# Altium PCB EtherIOv2.PcbDoc (part 2 of 2)
Units mil, origin at the board's own origin, x right, y up, seen from the top; angles counter-clockwise.
Board outline 4380 x 2505 mil, 2 copper layers (Top Layer, Bottom Layer); 104 components, 130 nets, 501 pads, 199 vias.
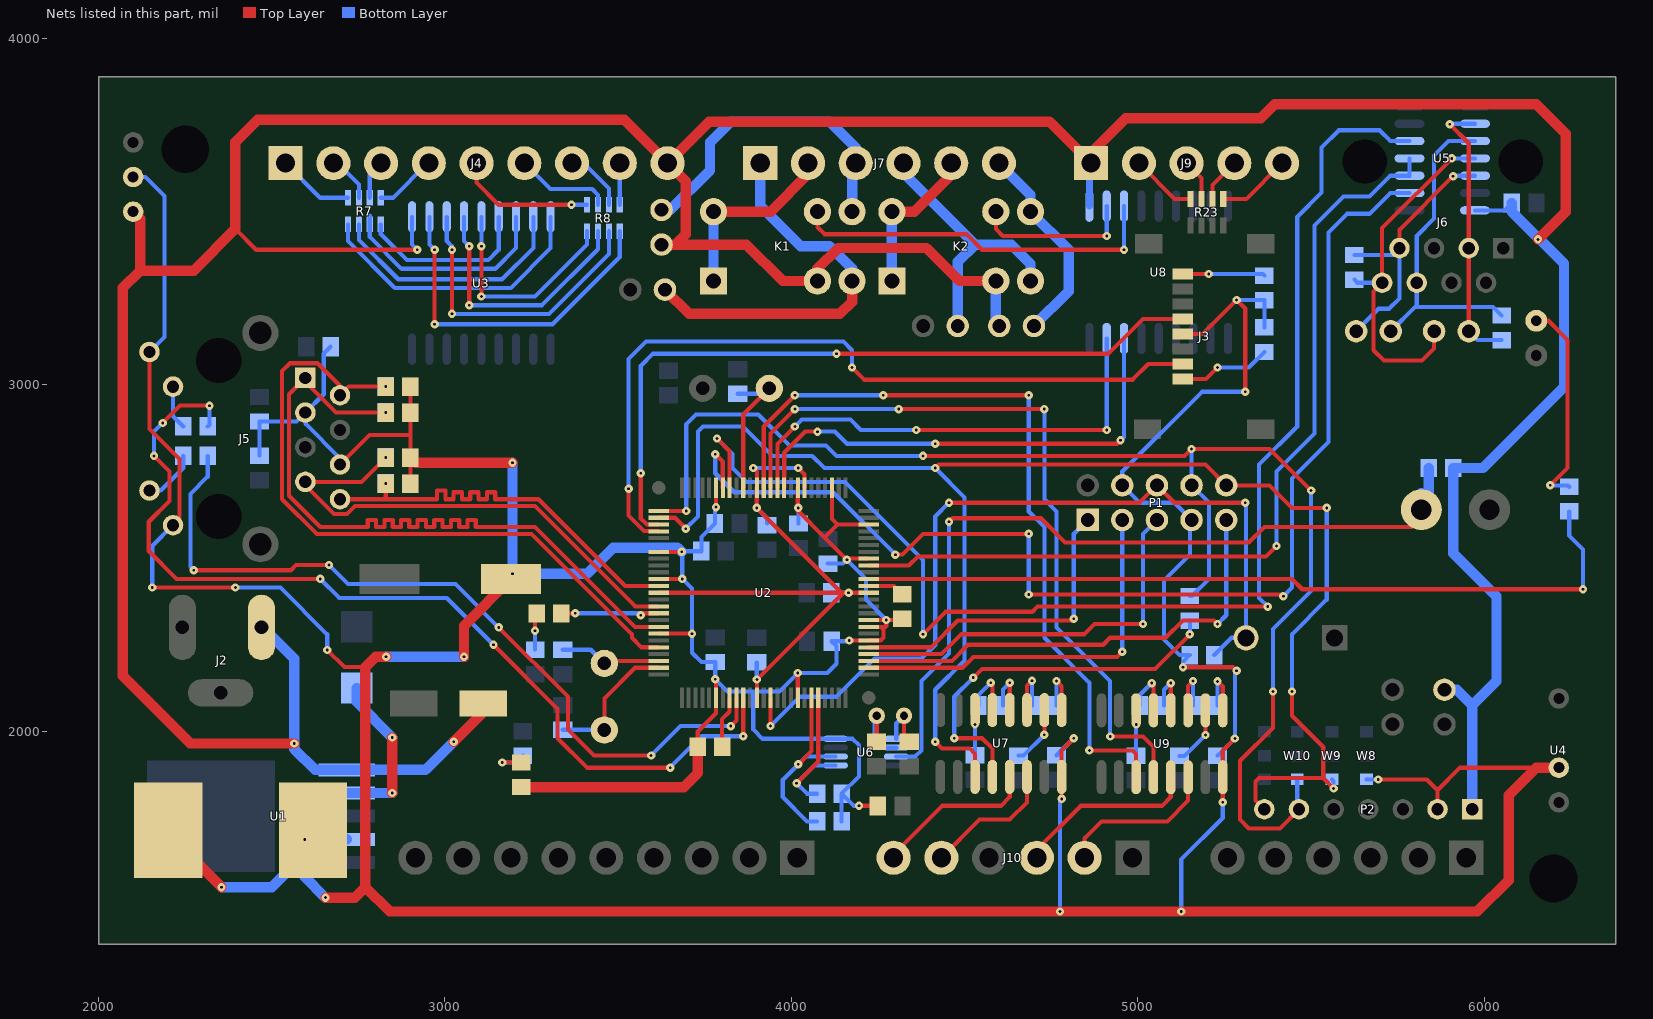
[diagram p2: the nets of this part, all layers, seen from the top]

## Via types
v1: diameter 24, hole 8, Top Layer to Bottom Layer, 199 vias

## Nets (pads, with @x,y where several pads share a name; then routed paths per layer and width w, separated by ;. In a path a pad name is that pad's centre, name@x,y a point inside that pad or via, vN(x,y) a via of type N, cw(c..) or ccw(c..) an arc to the next point about the centre after c; other vN are vias at no path point) (continued)
NetC6_2: C6.2 U2.16 X1.2 | length 415.4
  Top Layer w12: U2.16@3860.94,2703.15 3860.94,2914.88 X1.2@3936.06,2990
  Bottom Layer w12: C6.2@3845,2974.57 3920.63,2974.57 X1.2@3936.06,2990
NetC9_2: C9.2 U2.48 X2.1 | length 296.1
  Top Layer w12: X2.1@3460,2196.06 3467.09,2203.15 U2.48@3616.85,2203.15
  Bottom Layer w12: C9.2@3340,2235.43 3420.63,2235.43 X2.1@3460,2196.06
NetC10_2: C10.2 U2.49 X2.2 | length 404.8
  Top Layer w12: X2.2@3460,2003.94 3460,2095 3548.46,2183.46 U2.49@3616.85,2183.46
  Bottom Layer w12: C10.2@3340,2004.57 3459.37,2004.57 X2.2@3460,2003.94
NetC20_2: C20.2 C21.2 C22.2 U2.7 U2.14 U2.38 U2.62 U2.88 | length 1829.5
  Top Layer w12: U2.38@3616.85,2400 4145,2400 ; v1(3890,2760) 3900.32,2749.68 U2.14@3900.32,2703.15 3900,2702.83 v1(3900,2645) 4145,2400 ; U2.62@3900.32,2096.85 v1(3900.32,2149.68) 4150.63,2400 ; v1(4020,2760) 4038.11,2741.89 U2.7@4038.11,2703.15 ; U2.88@4223.15,2400 v1(4165,2400) 4150.63,2400 ; 4145,2400 4150.63,2400
  Bottom Layer w12: v1(3890,2760) v1(4020,2760) ; v1@3900,2150 C22.2@3900,2199.13 ; v1(3900,2645) 3930,2615 C21.2@3930,2600.43 ; C20.2@4115,2400 v1(4165,2400)
NetC24_2: C24.2 R21.2 U6.3 | length 2397.9
  Top Layer w12: v1(4455,2605) 4465,2615 4720,2615 4790,2545 5320,2545 5365,2590 5790,2590 5818.15,2618.15 C24.2@5818.15,2640
  Bottom Layer w12: U6.3@4302.6,1927.2 4357.2,1927.2 4375,1945 4375,2145 4455,2225 v1(4455,2605)
  Bottom Layer w30: C24.2@5818.15,2687.72 C24.2@5818.15,2640 5839.57,2661.42 R21.2@5839.57,2760
NetC25_2: C25.2 U6.1 X3.1 | length 156.7
  Top Layer w12: X3.1@4325,2045 4325,1985.43 C25.2@4340,1970.43
  Bottom Layer w12: U6.1@4302.6,1978.39 4302.6,2022.6 X3.1@4325,2045
NetC26_2: C26.2 U6.2 X3.2 | length 219.5
  Top Layer w12: C26.2@4245,1970.43 4246.26,1971.69 X3.2@4246.26,2045
  Bottom Layer w12: X3.2@4246.26,2045 4240,2038.74 4240,1975 4262.2,1952.8 U6.2@4302.6,1952.8
NetC29_1: C29.1 U7.3 | length 161.1
  Top Layer w12: U7.3@4680,2061.46 4680,2131.73 v1(4694.13,2145.87)
  Bottom Layer w12: C29.1@4694.13,2075 v1(4694.13,2145.87)
NetC29_2: C29.2 U7.1 | length 159.8
  Top Layer w12: v1(4765,2145) 4780,2130 U7.1@4780,2061.46
  Bottom Layer w12: C29.2@4765,2075 v1(4765,2145)
NetC30_1: C30.1 U7.2 | length 171.3
  Top Layer w12: v1(4730,1990) U7.2@4730,2061.46
  Bottom Layer w12: C30.1@4655,1930 4670,1930 v1(4730,1990)
NetC31_1: C31.1 U7.4 | length 151.5
  Top Layer w12: U7.4@4630,2061.46 v1(4630,2140)
  Bottom Layer w12: C31.1@4610.87,2075 4610.87,2120.87 v1(4630,2140)
NetC31_2: C31.2 U7.5 | length 160.1
  Top Layer w12: v1(4575,2140) 4580,2135 U7.5@4580,2061.46
  Bottom Layer w12: C31.2@4540,2075 4540,2105 v1(4575,2140)
NetC32_1: C32.1 U7.6 | length 130.6
  Top Layer w12: v1(4530,2020) U7.6@4530,2061.46
  Bottom Layer w12: C32.1@4530,1930.87 v1(4530,2020)
NetC34_1: C34.1 U9.3 | length 161.1
  Top Layer w12: U9.3@5145,2060.59 5145,2130.87 v1(5159.13,2145)
  Bottom Layer w12: C34.1@5159.13,2074.13 v1(5159.13,2145)
NetC34_2: C34.2 U9.1 | length 159.8
  Top Layer w12: v1(5230,2144.13) 5245,2129.13 U9.1@5245,2060.59
  Bottom Layer w12: C34.2@5230,2074.13 v1(5230,2144.13)
NetC35_1: C35.1 U9.2 | length 171.3
  Top Layer w12: v1(5195,1989.13) U9.2@5195,2060.59
  Bottom Layer w12: C35.1@5120,1929.13 5135,1929.13 v1(5195,1989.13)
NetC36_1: C36.1 U9.4 | length 151.5
  Top Layer w12: U9.4@5095,2060.59 v1(5095,2139.13)
  Bottom Layer w12: C36.1@5075.87,2074.13 5075.87,2120 v1(5095,2139.13)
NetC36_2: C36.2 U9.5 | length 160.1
  Top Layer w12: v1(5040,2139.13) 5045,2134.13 U9.5@5045,2060.59
  Bottom Layer w12: C36.2@5005,2074.13 5005,2104.13 v1(5040,2139.13)
NetC37_1: C37.1 U9.6 | length 130.6
  Top Layer w12: v1(4995,2020) U9.6@4995,2060.59
  Bottom Layer w12: C37.1@4995,1930 v1(4995,2020)
NetD1_2: D1.2 R1.2 | length 123.1
  Top Layer w12: v1(3165,1910) D1.2@3220,1910
  Bottom Layer w12: v1(3165,1910) 3205.43,1910 R1.2@3225,1929.57
NetD2_2: D2.2 L1.1 U1.2 | length 1279.7
  Top Layer w30: L1.1@2201.34,1715 2201.34,1703.66 v1(2355,1550) ; v1(2848.07,1821.93) v1(2848.07,1981.93)
  Bottom Layer w30: v1(2355,1550) 2500,1550 2545,1595 2545,1765 2601.93,1821.93 U1.2@2716.06,1821.93 v1(2848.07,1821.93) ; D2.2@2745,2125 2745,2085 v1(2848.07,1981.93)
NetD3_1: D3.1 R24.1 | length 610.2
  Top Layer w12: D3.1@6150,3185 6185,3185 6240,3130 6240,2760 v1(6190,2710)
  Bottom Layer w12: v1(6190,2710) 6240.87,2710 R24.1@6245,2705.87
NetJ3_1: J3.1 R2.1 | length 267.4
  Top Layer w12: J3.1@5130,3016.69 5196.69,3016.69 v1(5230,3050)
  Bottom Layer w12: v1(5230,3050) 5320,3050 R2.1@5365,3095
NetJ3_8: J3.8 R5.1 | length 236.8
  Top Layer w12: J3.8@5130,3319.84 v1(5204.84,3319.84)
  Bottom Layer w12: v1(5204.84,3319.84) 5360.59,3319.84 R5.1@5365,3315.43
NetJ4_1: J4.1 R7.1 | length 221.4
  Bottom Layer w12: J4.1@2540,3640 2640,3540 R7.1@2720,3540
NetJ4_2: J4.2 R7.2 | length 137.7
  Bottom Layer w12: J4.2@2677.8,3640 2690,3640 2751.5,3578.5 R7.2@2751.5,3540
NetJ4_3: J4.3 R7.3 | length 113.5
  Bottom Layer w12: R7.3@2782.99,3540 2782.99,3607.4 J4.3@2815.59,3640
NetJ4_4: J4.4 R7.4 | length 216.9
  Bottom Layer w12: R7.4@2814.49,3540 2850,3540 2950,3640 J4.4@2953.39,3640 J4.4@2990,3640
NetJ4_5: J4.5 R8.1 | length 401.4
  Top Layer w12: J4.5@3091.18,3640 3091.18,3583.82 3155,3520 v1(3365,3520)
  Bottom Layer w12: v1(3365,3520) R8.1@3410,3520
NetJ4_6: J4.6 R8.2 | length 297.3
  Bottom Layer w12: J4.6@3228.98,3640 3303.98,3565 3425,3565 3441.5,3548.5 R8.2@3441.5,3520 R8.2@3441.5,3538.38
NetJ4_7: J4.7 R8.3 | length 183.5
  Bottom Layer w12: J4.7@3366.77,3640 3400,3640 3472.99,3567.01 R8.3@3472.99,3520
NetJ4_8: J4.8 R8.4 | length 120
  Bottom Layer w12: R8.4@3504.49,3520 3504.49,3639.92 J4.8@3504.57,3640
NetJ5_P10: J5.P10 R10.2 | length 127.2
  Bottom Layer w12: J5.P10@2215,2995 2215,2909.57 R10.2@2244.57,2880
NetJ5_P11: J5.P11 R9.2 | length 159.7
  Bottom Layer w12: J5.P11@2147,2695 2179.57,2695 2244.57,2760 2244.57,2794.57 R9.2@2244.13,2795
NetJ7_1: J7.1 K1.NC W4.1 | length 1141.7
  Top Layer w30: W4.1@3635,3275 3705,3205 4140,3205 4175,3240 K1.NC@4175,3300
  Bottom Layer w30: J7.1@3910,3640 3910,3517.33 4027.33,3400 4110,3400 4175,3335 K1.NC@4175,3300
NetJ7_2: J7.2 K1.COM1 K1.COM2 | length 549.7
  Top Layer w30: K1.COM2@3775,3500 3940,3500 4047.8,3607.8 J7.2@4047.8,3640
  Bottom Layer w30: K1.COM1@3775,3300 K1.COM2@3775,3500
NetJ7_3: J7.3 K1.NO W3.1 | length 953.2
  Bottom Layer w30: W3.1@3625,3505 3650,3505 3765,3620 3765,3700 3825,3760 4110,3760 4185.59,3684.41 J7.3@4185.59,3640 4175,3629.41 K1.NO@4175,3500 K1.NO@4175,3480
NetJ7_4: J7.4 K2.NC W5.1 | length 809.1
  Bottom Layer w30: J7.4@4323.39,3640 4323.39,3611.61 4530,3405 ; W5.1@4480,3170 4480,3355 4530,3405 ; K2.NC@4690,3300 4690,3350 4635,3405 4530,3405
NetJ7_5: J7.5 K2.COM1 K2.COM2 | length 449
  Top Layer w30: K2.COM2@4290,3500 4355,3500 4461.18,3606.18 J7.5@4461.18,3640
  Bottom Layer w30: K2.COM1@4290,3300 K2.COM2@4290,3500
NetJ7_6: J7.6 K2.NO W6.1 | length 594.7
  Bottom Layer w30: J7.6@4598.98,3640 4690,3548.98 K2.NO@4690,3500 4800,3390 4800,3270 W6.1@4700,3170
NetJ9_2: J9.2 R23.4 | length 192
  Top Layer w12: J9.2@5002.8,3640 5106.02,3536.77 R23.4@5152.01,3536.77
NetJ9_3: J9.3 R23.3 | length 121
  Top Layer w12: J9.3@5140.59,3640 5183.5,3597.09 R23.3@5183.5,3536.77
NetJ9_4: J9.4 R23.2 | length 129.5
  Top Layer w12: R23.2@5215,3536.77 5215,3576.61 J9.4@5278.39,3640
NetJ9_5: J9.5 R23.1 | length 212.4
  Top Layer w12: R23.1@5246.5,3536.77 5312.95,3536.77 J9.5@5416.18,3640
NetK1_COIL2: K1.COIL2 U8.12 | length 1082.9
  Top Layer w12: K1.COIL2@4075,3500 4075,3455 4095,3435 4505,3435 4550,3390 v1(4960,3390)
  Bottom Layer w12: v1(4960,3390) U8.12@4960,3515.94
NetK2_COIL2: K2.COIL2 U8.11 | length 464.2
  Top Layer w12: K2.COIL2@4590,3500 4590,3450 4610,3430 v1(4910,3430)
  Bottom Layer w12: v1(4910,3430) U8.11@4910,3515.94
NetR7_5: R7.5 U3.15 | length 506.9
  Bottom Layer w12: R7.5@2814.49,3463.23 2814.49,3435.51 2890,3360 3125,3360 3155,3390 U3.15@3155,3485
NetR7_6: R7.6 U3.16 | length 636
  Bottom Layer w12: 2782.99,3487.99 R7.6@2782.99,3463.23 2782.99,3427.01 2875,3335 3145,3335 3205,3395 U3.16@3205,3485
NetR7_7: R7.7 U3.17 | length 722.5
  Bottom Layer w12: R7.7@2751.5,3463.23 2751.5,3418.5 2865,3305 3165,3305 3255,3395 U3.17@3255,3485
NetR7_8: R7.8 U3.18 | length 826.8
  Bottom Layer w12: R7.8@2720,3463.23 2720,3415 2855,3280 3190,3280 3305,3395 U3.18@3305,3485
NetR8_5: R8.5 U3.11 | length 1005
  Top Layer w12: v1(2970,3175) v1(2970,3390)
  Bottom Layer w12: U3.11@2955,3485 2955,3405 v1(2970,3390) ; v1(2970,3175) 3310,3175 3504.49,3369.49 R8.5@3504.49,3443.23
NetR8_6: R8.6 U3.12 | length 876.1
  Top Layer w12: v1(3020,3205) v1(3020,3390)
  Bottom Layer w12: U3.12@3005,3485 3005,3415 3020,3400 v1(3020,3390) ; v1(3020,3205) 3300,3205 3472.99,3377.99 R8.6@3472.99,3443.23
NetR8_7: R8.7 U3.13 | length 751.3
  Top Layer w12: v1(3070,3230) v1(3070,3400)
  Bottom Layer w12: U3.13@3055,3485 3055,3415 v1(3070,3400) ; v1(3070,3230) 3280,3230 3441.5,3391.5 R8.7@3441.5,3443.23
NetR8_8: R8.8 U3.14 | length 635.4
  Top Layer w12: v1(3105,3255) v1(3105,3400)
  Bottom Layer w12: v1(3105,3255) 3260,3255 3410,3405 R8.8@3410,3443.23 ; v1(3105,3400) U3.14@3105,3485
NetR9_1: R9.1 U2.59 | length 2318.3
  Top Layer w12: v1(2275,2465) 2555,2465 2570,2480 v1(2665,2480) ; v1(3155,2300) 3355,2100 3355,2005 3430,1930 v1(3595,1930) ; v1(3825,2015) 3841.26,2031.26 U2.59@3841.26,2096.85
  Bottom Layer w12: v1(2275,2465) 2265,2475 2265,2685 2315,2735 R9.1@2315,2795 ; v1(2665,2480) 2720,2425 3030,2425 v1(3155,2300) ; v1(3595,1930) 3680,2015 v1(3825,2015)
NetR10_1: R10.1 U2.60 | length 2814.6
  Top Layer w12: v1(2160,2795) 2205,2750 2205,2665 2145,2605 2145,2520 2225,2440 v1(2640,2440) ; v1(2185,2890) 2235,2940 v1(2320,2940) ; v1(3140,2250) 3325,2065 3325,1980 3410,1895 v1(3650,1895) ; v1(3860.94,1985.94) U2.60@3860.94,2096.85
  Bottom Layer w12: v1(2160,2795) 2160,2865 v1(2185,2890) ; R10.1@2315.43,2880 2320,2884.57 v1(2320,2940) ; v1(2640,2440) 2695,2385 3005,2385 v1(3140,2250) ; v1(3650,1895) 3740.94,1985.94 v1(3860.94,1985.94)
NetR11_1: R11.1 U2.58 | length 150.4
  Top Layer w12: R11.1@3800,1955.43 3800,2035 3821.57,2056.57 U2.58@3821.57,2096.85
NetR14_2: R14.2 R15.1 | length 106
  Top Layer w12: v1(3260,2290) 3260,2335.43 R15.1@3264.57,2340
  Bottom Layer w12: R14.2@3260,2235.87 v1(3260,2290)
NetR15_2: R15.2 U2.41 | length 298.4
  Top Layer w12: R15.2@3336.38,2340.94 R15.2@3335.43,2340 3375,2340 v1(3375.94,2340.94) ; v1(3565,2335) 3565,2336.89 3569.06,2340.94 U2.41@3616.85,2340.94
  Bottom Layer w12: v1(3375.94,2340.94) 3569.06,2340.94 3565,2336.89 v1(3565,2335)
NetR22_2: R22.2 U7.12 | length 1118
  Top Layer w12: v1(4470,1980) 4550,1980 4580,1950 U7.12@4580,1868.54 ; v1(4525,2155) 4550,2180 5050,2180 v1(5150,2280)
  Bottom Layer w12: v1(4470,1980) 4470,2100 v1(4525,2155) ; v1(5150,2280) R22.2@5150,2319.57
R\S\T\: P1.6 R16.1 S1.2 U2.64 | length 2480.2
  Top Layer w12: v1(3939.68,2015.32) U2.64@3939.68,2096.85 ; v1(4455,2660) 5005,2660 P1.6@5055,2710 5105,2660 v1(5310,2660)
  Bottom Layer w12: v1(3939.68,2015.32) 4024.37,2100 4130,2100 4240,2210 4375,2210 4415,2250 4415,2620 v1(4455,2660) ; R16.1@5220.43,2220 5270.43,2270 S1.2@5312.05,2270 5312.05,2657.95 v1(5310,2660)
REL0: U2.10 U8.7 | length 1413.9
  Top Layer w12: U2.10@3979.06,2703.15 3979.06,2804.06 4040,2865 v1(4075,2865) ; v1(4415,2830) 4940,2830 v1(4950,2840)
  Bottom Layer w12: v1(4075,2865) 4125,2865 4160,2830 v1(4415,2830) ; v1(4950,2840) 4960,2850 U8.7@4960,3134.06
REL1: U2.11 U8.8 | length 1382.6
  Top Layer w12: U2.11@3959.37,2703.15 3959.37,2829.37 v1(4010,2880) ; v1(4360,2870) 4830,2870 v1(4910,2870)
  Bottom Layer w12: v1(4010,2880) 4030,2900 4170,2900 4200,2870 v1(4360,2870) ; v1(4910,2870) U8.8@4910,3134.06
"RS485 DE": U2.92 U5.3 U5.4 | length 2554.4
  Top Layer w12: U2.92@4223.15,2478.74 4338.74,2478.74 4365,2505 5370,2505 v1(5400,2535)
  Bottom Layer w12: v1(5400,2535) 5400,2750 5510,2860 5510,3460 5593.82,3543.82 5668.62,3543.82 5728.62,3603.82 U5.3@5784.13,3603.82 U5.4@5784.13,3653.82
RX+: J6.7 R19.2 U5.12 W1.2 | length 783.3
  Top Layer w12: J6.7@5755,3394.76 5755,3447.6 v1(5909.92,3602.52)
  Bottom Layer w12: R19.2@5625,3374.76 5735,3374.76 J6.7@5755,3394.76 5755,3249.76 5725,3219.76 5695,3219.76 W1.2@5630,3154.76 ; v1(5909.92,3602.52) 5911.22,3603.82 U5.12@5973.11,3603.82
RX-: J6.8 R19.1 U5.11 W2.2 | length 1059.9
  Top Layer w12: W2.2@5845,3154.76 W2.2@5855,3154.76 5855,3105 5820,3070 5710,3070 5680,3100 5680,3269.76 J6.8@5705,3294.76 5705,3452.6 v1(5906.22,3653.82)
  Bottom Layer w12: R19.1@5625,3303.9 5634.13,3294.76 J6.8@5705,3294.76 ; v1(5906.22,3653.82) U5.11@5973.11,3653.82
RXIN: C7.1 J5.P8 R17.1 U2.37 | length 1238.9
  Top Layer w12: J5.P8@2697,2670 2830,2670 ; v1(2829.13,2715) 2829.13,2670.87 2830,2670 ; U2.37@3616.85,2419.68 3520.32,2419.68 3270,2670 3145,2670 3145,2690 3121,2690 3121,2670 3097,2670 3097,2690 3073,2690 3073,2670 3049,2670 3049,2690 3025,2690 3025,2670 3001,2670 3001,2695 2977,2695 2977,2670 2830,2670
RXIP: C8.1 J5.P7 R18.1 U2.40 | length 1454.4
  Top Layer w12: v1(2829.13,2790) 2759.13,2720 J5.P7@2597,2720 2597,2709.86 2679.38,2627.47 2717.47,2627.47 2740,2650 3260,2650 3549.37,2360.63 U2.40@3616.85,2360.63
SCK: J3.5 U2.28 | length 2120.5
  Top Layer w12: v1(3565,2745) 3565,2614.57 3582.72,2596.85 U2.28@3616.85,2596.85 ; v1(4130,3090) 4915,3090 5014.92,3189.92 J3.5@5130,3189.92
  Bottom Layer w12: v1(3565,2745) 3565,3055 3600,3090 v1(4130,3090)
SCL: R3.1 U2.70 U6.6 | length 565.9
  Top Layer w12: v1(4020,1905) 4057.8,1942.8 U2.70@4057.8,2096.85
  Bottom Layer w12: R3.1@4074.13,1740 4045,1740 3975,1810 3975,1860 v1(4020,1905) 4042.2,1927.2 U6.6@4127.4,1927.2
"SD S\S\": J3.2 U2.29 | length 2272.2
  Top Layer w12: v1(3530,2700) 3530,2622.7 3574.85,2577.85 3616.17,2577.85 U2.29@3616.85,2577.17 ; v1(4175,3050) 4210,3015 4985,3015 5030,3060 J3.2@5130,3060
  Bottom Layer w12: v1(3530,2700) 3530,3075 3580,3125 4150,3125 4175,3100 v1(4175,3050)
SDA: R4.1 U2.71 U6.5 | length 478.1
  Top Layer w12: v1(4015,1850) 4077.48,1912.48 U2.71@4077.48,2096.85
  Bottom Layer w12: R4.1@4074.13,1820 4045,1820 v1(4015,1850) 4066.61,1901.61 U6.5@4127.4,1901.61
STAT: R24.2 U2.90 | length 2315.6
  Top Layer w12: U2.90@4223.15,2439.37 5445,2439.37 5474.37,2410 v1(6285,2410)
  Bottom Layer w12: R24.2@6245,2635 6245,2565 6285,2525 v1(6285,2410)
T\R\S\T\: R6.1 U2.89 | length 106.9
  Top Layer w12: U2.89@4223.15,2419.68 4295.75,2419.68 R6.1@4320,2395.43
TCK: P1.1 U2.80 | length 927.6
  Top Layer w12: U2.80@4223.15,2242.52 4402.52,2242.52 4480,2320 4810,2320 v1(4815,2325)
  Bottom Layer w12: v1(4815,2325) 4815,2570 P1.1@4855,2610
TDI: P1.9 U2.78 | length 1369.7
  Top Layer w12: U2.78@4223.15,2203.15 4463.15,2203.15 4510,2250 4900,2250 4920,2270 5080,2270 5130,2320 5220,2320 v1(5230,2310)
  Bottom Layer w12: v1(5230,2310) 5255,2335 P1.9@5255,2610
TDO: P1.3 U2.77 | length 1131.1
  Top Layer w12: U2.77@4223.15,2183.46 4493.46,2183.46 4525,2215 4940,2215 v1(4955,2230)
  Bottom Layer w12: v1(4955,2230) P1.3@4955,2610
TMS: P1.5 U2.79 | length 1144.5
  Top Layer w12: U2.79@4223.15,2222.83 4432.83,2222.83 4490,2280 4845,2280 4875,2310 v1(5015,2310)
  Bottom Layer w12: v1(5015,2310) 5015,2570 P1.5@5055,2610
TX+: J6.3 R20.1 U5.9 W2.1 | length 799.8
  Top Layer w12: v1(5899.92,3752.52) 5955,3697.44 J6.3@5955,3394.76 W2.1@5955,3154.76
  Bottom Layer w12: v1(5899.92,3752.52) 5901.22,3753.82 U5.9@5973.11,3753.82 ; W2.1@5955,3154.76 5980.43,3129.33 R20.1@6050,3129.33
TX-: J6.6 R20.2 U5.10 W1.1 | length 969.2
  Top Layer w12: J6.6@5794.92,3284.69 J6.6@5805,3294.76
  Bottom Layer w12: W1.1@5730,3154.76 5800,3224.76 ; U5.10@5973.11,3703.82 5896.22,3703.82 5855,3662.6 5855,3480 5805,3430 J6.6@5805,3294.76 5805,3229.76 5800,3224.76 ; R20.2@6050,3200.2 6025.43,3224.76 5800,3224.76
TXON: C4.1 J5.P2 R13.1 U2.46 | length 2013
  Top Layer w12: v1(2829.13,2995) 2722,2995 J5.P2@2697,2970 2697,2997.44 2631.91,3062.53 2552.53,3062.53 2530,3040 2530,2670 2630,2570 3250,2570 3540,2280 3540,2270 3567.48,2242.52 U2.46@3616.85,2242.52
TXOP: C3.1 J5.P1 R12.1 U2.43 | length 2143.7
  Top Layer w12: v1(2829.13,2920) 2685,2920 2597,3008 J5.P1@2597,3020 2550,2973 2550,2680 2640,2590 2777,2590 2777,2610 2801,2610 2801,2590 2825,2590 2825,2610 2849,2610 2849,2590 2873,2590 2873,2610 2897,2610 2897,2590 2921,2590 2921,2610 2945,2610 2945,2590 2969,2590 2969,2610 2993,2610 2993,2590 3017,2590 3017,2610 3041,2610 3041,2590 3065,2590 3065,2610 3089,2610 3089,2590 3260,2590 3548.43,2301.57 U2.43@3616.85,2301.57
U0RX: P1.8 P2.6 R22.1 U2.26 W10.3 | length 4064.4
  Top Layer w12: U2.26@3616.85,2636.22 v1(3696.22,2636.22) ; v1(4380,2795) 5135,2795 v1(5155,2815) 5380,2815 v1(5500,2695) ; v1(5390,2115) 5390,2010 5295,1915 5295,1745 5320,1720 5410,1720 P2.6@5465,1775
  Bottom Layer w12: v1(3696.22,2636.22) 3696.22,2886.22 3725,2915 3904.17,2915 3994.17,2825 4100,2825 4130,2795 v1(4380,2795) ; R22.1@5150,2390.43 5155.43,2390.43 5205,2440 5205,2660 P1.8@5155,2710 v1(5155,2815) ; v1(5390,2115) 5390,2295 5500,2405 v1(5500,2695) ; W10.3@5460,1861.1 5460,1780 P2.6@5465,1775 P2.6@5475,1785
U0RXH: J10.6 U7.13 | length 520.4
  Top Layer w12: J10.6@4295,1635 4295,1645 4435,1785 4605,1785 4630,1810 U7.13@4630,1868.54 U7.13@4630,1820
U0TX: P1.10 P2.7 U2.27 U7.11 W9.3 | length 4587.7
  Top Layer w12: U2.27@3616.85,2616.54 3663.46,2616.54 v1(3695,2585) ; v1(4415,1970) 4435,1950 4515,1950 4530,1935 U7.11@4530,1868.54 ; v1(4415,2760) 4425,2770 5195,2770 P1.10@5255,2710 5380,2710 5445,2645 v1(5545,2645) ; P2.7@5365,1775 5340,1800 5340,1855 5350,1865 5535,1865 ; v1(5445,2115) 5445,2045 5535,1955 5535,1865 ; v1(5565,1835) 5535,1865
  Bottom Layer w12: v1(3695,2585) 3730,2620 3730,2865 3745,2880 3860,2880 3945,2795 4060,2795 4095,2760 v1(4415,2760) 4500,2675 4500,2205 4415,2120 v1(4415,1970) ; v1(5445,2115) 5445,2280 5545,2380 v1(5545,2645) ; W9.3@5560,1861.1 5565,1856.1 v1(5565,1835)
U0TXH: J10.5 U7.14 | length 387
  Top Layer w12: J10.5@4432.8,1635 4542.8,1745 4630,1745 4680,1795 U7.14@4680,1868.54
U1RX: U2.12 U9.12 | length 2224.4
  Top Layer w12: U2.12@3939.68,2703.15 3939.68,2859.68 v1(4010,2930) ; v1(4310,2930) v1(4730,2930) ; v1(4920,1985) 5015,1985 5045,1955 U9.12@5045,1867.68
  Bottom Layer w12: v1(4010,2930) v1(4310,2930) ; v1(4730,2930) 4730,2670 4765,2635 4765,2300 4920,2145 v1(4920,1985)
U1RXH: J10.3 U9.13 | length 530.5
  Top Layer w12: J10.3@4708.39,1635 4708.39,1658.39 4835,1785 5070,1785 5095,1810 U9.13@5095,1867.68
U1TX: U2.13 U9.11 | length 2283.1
  Top Layer w12: U2.13@3920,2703.15 3920,2880 v1(4010,2970) ; v1(4265,2970) v1(4685,2970) ; v1(4860,1945) 4985,1945 4995,1935 U9.11@4995,1867.68
  Bottom Layer w12: v1(4010,2970) v1(4265,2970) ; v1(4685,2970) 4685,2635 4730,2590 4730,2270 4860,2140 v1(4860,1945)
U1TXH: J10.2 U9.14 | length 467.8
  Top Layer w12: J10.2@4846.18,1635 4846.18,1691.18 4895,1740 5085,1740 5145,1800 U9.14@5145,1867.68
U2RX: U2.19 U5.2 | length 3485.3
  Top Layer w12: v1(3780,2800) 3801.89,2778.11 U2.19@3801.89,2703.15 ; v1(4300,2510) 4320,2510 4380,2570 v1(4685,2570) ; v1(4685,2395) 5415,2395 v1(5420,2390)
  Bottom Layer w12: v1(3780,2800) 3780,2745 3835,2690 4120,2690 v1(4300,2510) ; v1(4685,2395) v1(4685,2570) ; v1(5420,2390) 5445,2415 5445,2730 5550,2835 5550,3440 5603.82,3493.82 5668.62,3493.82 5728.62,3553.82 U5.2@5784.13,3553.82
U2TX: U2.18 U5.5 | length 3861.2
  Top Layer w12: v1(3785,2845) 3821.57,2808.43 U2.18@3821.57,2703.15 ; v1(4380,2280) 4445,2345 4695,2345 4710,2360 v1(5375,2360)
  Bottom Layer w12: v1(3785,2845) 3830,2800 3830,2760 3870,2720 4155,2720 4380,2495 v1(4380,2280) ; v1(5375,2360) 5350,2385 5350,2770 5460,2880 5460,3485 5530,3555 5530,3685 5580,3735 5697.44,3735 5728.62,3703.82 U5.5@5784.13,3703.82
VCC3.3V: C2.2 C11.2 C12.1 C13.1 C14.2 C15.2 C16.2 C17.2 C18.2 C19.2 C27.1 C28.1 C33.1 D1.1 J3.4 J5.P3 J5.P6 J5.P9 J5.P12 L1.2 P1.4 P1.7 P2.2 pad.1 R2.2 R3.2 R4.2 R5.2 R6.2 R11.2 R12.2 R13.2 R16.2 R17.2 R18.2 U1.4 U2.3 U2.8 U2.20 U2.32 U2.36 U2.44 U2.56 U2.68 U2.81 U2.83 U2.84 U2.93 U2.98 U4.2 U6.8 U7.16 U9.16 W8.3 | length 18193.3
  Top Layer w12: J5.P9@2147,3095 2147,2873 2234,2786 2234,2614 J5.P12@2215,2595 ; v1(2155,2415) v1(2395,2415) ; v1(2660,2235) 2709.8,2185.2 2770,2185.2 ; J5.P6@2697,2770 2782,2855 2900,2855 ; R17.2@2900,2715 R18.2@2900,2790 2900,2855 ; R13.2@2900,2995 R12.2@2900,2920 2900,2855 ; U2.32@3616.07,2518.89 U2.32@3616.85,2518.11 v1(3683.11,2518.11) ; U2.44@3616.85,2281.89 v1(3713.11,2281.89) ; U2.36@3616.85,2439.37 3684.37,2439.37 v1(3685,2440) ; R11.2@3729.57,1955 3729.57,1999.57 3782.2,2052.2 U2.56@3782.2,2096.85 v1@3782.2,2147.8 ; v1(3782.2,2647.2) U2.20@3782.2,2703.15 ; U2.68@4018.43,2096.85 v1(4018.43,2168.43) ; U2.8@4018.43,2703.15 v1@4018.43,2646.57 ; v1(4020,2645) v1@4018.43,2646.57 ; U2.3@4116.85,2703.15 4116.85,2612.68 4132.68,2596.85 ; v1(4167.2,2262.2) U2.81@4223.15,2262.2 4223.83,2262.89 4257.97,2262.89 4265.68,2270.6 4265.68,2293.18 4257.97,2300.89 ; v1(4195,1785) C27.1@4249.57,1785 ; U2.84@4223.15,2321.26 v1(4273.74,2321.26) ; U2.93@4223.15,2498.43 4163.43,2498.43 v1(4160,2495) 4095.41,2559.59 ; U2.98@4223.15,2596.85 4132.68,2596.85 ; U2.83@4223.83,2300.89 U2.83@4223.15,2301.57 4271.57,2301.57 4273.74,2303.74 v1(4273.74,2321.26) ; R6.2@4325,2321.26 v1(4273.74,2321.26) ; v1(4780,1805) U7.16@4780,1868.54 4780,1945 v1(4815,1980) ; v1(5130,2185) 5275,2185 ; J3.4@5130,3146.61 5186.61,3146.61 v1(5285,3245) 5310,3220 v1(5310,2980) ; v1(5245,1795) U9.16@5245,1867.68 5245,1944.13 v1(5280,1979.13) ; v1(5693.9,1861.1) 5833.9,1861.1 5865,1830 ; P2.2@5865,1775 5865,1830 ; 6150,1895 5930,1895 5865,1830 ; v1@4018.43,2646.57 4018.43,2636.57 4095.41,2559.59 ; 4095.41,2559.59 4132.68,2596.85
  Top Layer w30: v1(2655,1520) 2740,1520 2770,1550 ; v1(2830,2215) 2799.8,2215 2770,2185.2 2770,1550 ; R18.2@2900,2790 2915,2775 v1(3195,2775) ; v1(3055,2215) 3055,2304.8 C2.2@3190.2,2440 ; D1.1@3220,1839.13 3689.13,1839.13 3729.57,1879.57 R11.2@3729.57,1955 ; U4.2@6215,1895 6150,1895 6070,1815 6070,1570 5980,1480 v1(5125,1480) v1(4775,1480) 2840,1480 2770,1550
  Bottom Layer w12: pad.1@2100,3600 2135,3600 2190,3545 2190,3138 J5.P9@2147,3095 ; v1(2155,2415) 2155,2535 J5.P12@2215,2595 ; v1(2395,2415) 2525,2415 2660,2280 v1(2660,2235) ; C12.1@2465,2795.87 C11.2@2465,2894.13 2571.13,2894.13 J5.P3@2597,2920 ; C13.1@2670,3110 2650,3090 2650,2973 J5.P3@2597,2920 ; J5.P6@2697,2770 2697,2788 2597,2888 J5.P3@2597,2920 ; v1@3782.2,2147.8 v1(3780,2150) ; v1(3782.2,2647.2) 3779.13,2644.13 C17.2@3779.13,2600 3740,2560.87 C19.2@3740,2520 3685,2520 v1(3683.11,2518.11) 3685,2516.22 v1(3685,2440) 3713.11,2411.89 v1(3713.11,2281.89) 3713.11,2226.89 3740,2200 C14.2@3780,2200 v1(3780,2150) ; C16.2@4020,2600 v1(4020,2645) ; C18.2@4105,2484.13 4149.13,2484.13 v1(4160,2495) 4215,2440 4215,2380 v1(4273.74,2321.26) ; R3.2@4145,1740 R4.2@4145,1820 ; v1(4167.2,2262.2) 4165,2260 C15.2@4115.87,2260 4130,2245.87 4130,2195 4103.43,2168.43 v1(4018.43,2168.43) 3965,2115 3890,2115 ; v1(4195,1785) 4180,1785 R4.2@4145,1820 ; C28.1@4765,1930.87 4765.87,1930.87 v1(4815,1980) ; v1(4775,1480) 4775,1800 v1(4780,1805) ; v1(5125,1480) 5125,1630 5245,1750 v1(5245,1795) ; v1(5130,2185) 5130,2200.43 R16.2@5149.57,2220 5120,2220 5075,2265 5075,2435 5150,2510 5150,2605 P1.7@5155,2610 5105,2660 5005,2660 P1.4@4955,2710 4955,2750 5185,2980 v1(5310,2980) ; C33.1@5230,1930 5230.87,1930 v1(5280,1979.13) v1@5280,2170 ; v1(5285,3245) 5364.57,3245 R5.2@5365,3244.57 R2.2@5365,3165.87 ; W8.3@5660,1861.1 v1(5693.9,1861.1) ; v1(3780,2150) 3815,2115 3890,2115 ; 3890,2115 3890,2005 3916.61,1978.39 U6.8@4127.4,1978.39 4176.61,1978.39 4195,1960 4195,1870 R4.2@4145,1820
  Bottom Layer w30: v1(2655,1520) 2595,1580 v1(2595,1688.07) U1.4@2716.06,1688.07 ; v1(2830,2215) v1(3055,2215) ; v1(3195,2775) v1(3195,2455) 3410,2455 3485,2530 3671.22,2530 v1(3683.11,2518.11)
  other v1: 5285,2175
VCC5V: C1.2 C23.1 J2.1 J4.9 J9.1 K1.COIL1 K2.COIL1 P2.1 pad.2 R21.1 U1.1 U3.10 U5.14 U8.10 W3.2 W6.2 W12.1 | length 12628.4
  Top Layer w12: 2395,3450 2455,3390 v1(2920,3390)
  Top Layer w30: pad.2@2100,3500 2120,3480 2120,3330 ; v1(2565,1965) 2265,1965 2070,2160 2070,3280 2120,3330 ; v1(3025,1970) 3110.39,2055.39 C1.2@3110.39,2080 ; W3.2@3625,3405 3665,3405 ; K2.COIL1@4590,3300 4485,3300 4390,3395 4135,3395 4075,3335 K1.COIL1@4075,3300 3975,3300 3870,3405 3665,3405 ; v1(6155,3420) 6235,3500 6235,3725 6150,3810 5395,3810 5355,3770 4965,3770 4865,3670 J9.1@4865,3640 4745,3760 3762.36,3760 J4.9@3642.36,3640 ; 2120,3330 2275,3330 2395,3450 2395,3700 2460,3765 3517.36,3765 J4.9@3642.36,3640 ; J4.9@3642.36,3640 3695,3587.36 3695,3435 3665,3405
  Bottom Layer w12: U3.10@2905,3485 2905,3405 v1(2920,3390) ; U5.14@5973.11,3503.82 6058.39,3503.82 C23.1@6079.57,3525
  Bottom Layer w20: U8.10@4860,3515.94 4860,3635 J9.1@4865,3640
  Bottom Layer w30: J2.1@2474.37,2300 2565,2209.37 v1(2565,1965) 2565,1948.86 2625,1888.86 U1.1@2716.06,1888.86 2943.86,1888.86 v1(3025,1970) ; K2.COIL1@4590,3300 4590,3180 W6.2@4600,3170 ; W12.1@5885,2120 5920,2120 5965,2075 ; P2.1@5965,1775 5965,2075 ; C23.1@6079.57,3525 6079.57,3500.43 6230,3350 6230,2995 5995,2760 R21.1@5910.43,2760 5910.43,2514.57 6035,2390 6035,2145 5965,2075
pads on no net: J2.3 J5.MH3 J5.MH4 J5.P4 J5.P5 J6.MH1 J6.MH2 U1.6 U2.2 U2.5 U2.6 U2.35 U2.51 U2.52 U2.53 U2.55 U2.101 U2.102 U5.1 U5.8 U5.13 U6.7 U7.7 U7.8 U7.9 U7.10 U8.5 U8.6 U8.13 U8.14 U9.7 U9.8 U9.9 U9.10

## Polygon pours and split planes (outlines as drawn)
GND on Bottom Layer "BottomLayer-GND" (hatched 90Degree grid 10 track 10, remove dead copper, pour order 1000): 2000,1385 2000,3890 6380,3890 6380,1385
GND on Top Layer "Top Layer-GND" (hatched 90Degree grid 10 track 10, remove dead copper, pour order 1001): 2000,1385 2000,3890 6380,3890 6380,1385

## Keep-outs
Keep-Out Layer:
  the board outline again, w10

## Other copper
Top Layer:
  pour cut-out: 3565,3900 3565,3165 4260,3165 4325,3100 4740,3100 4870,3230 4870,3430 4770,3530 4770,3900
Bottom Layer:
  pour cut-out: 3565,3900 3565,3165 4260,3165 4325,3100 4740,3100 4870,3230 4870,3430 4770,3530 4770,3900

## Silkscreen, mask and mechanical layers (free items; w line width, h text height)
Top Overlay:
  text "REL0" at 3905,4135 h60
  text "REL1" at 4345,4130 h60
  text "INFRA OUT" at 4890,4005 h60
  text "NO" at 4205,3985 h60 r90
  text "NO" at 4645,3985 h60 r90
  text "NC" at 3920,3975 h60 r90
  text "NC" at 4335,3975 h60 r90
  text "COM" at 3460,3555 h60 r270
  text "LED7" at 2510,3545 h60 r270
  text "LED0" at 3185,3495 h60
  text "COM" at 4820,3485 h60
  text "PanBeam" at 6295,3295 h60 r90
  text "Ethernet" at 2805,3095 h60
  text "Diapro Kft." at 4095,2990 h60
  text "EtherIOv3" at 4120,2885 h60
  text "www.diapro.hu" at 3885,2800 h60
  text "ECs" at 4450,2690 h60
  text "5V IN" at 2640,2160 h60 r90
  text "Ext." at 5833.9,1861.1 h60
  text "COM" at 2945,1745 h60 r90
  text "BTN0" at 3000,1730 h60
  text "BTN7" at 3870,1730 h60
  text "RS232" at 4785,1720 h60
  text "IN B" at 5310,1225 h60
  text "IN A" at 5700,1225 h60

## Text inside footprints (layer, text, board x,y; h text height)
C24: Top Overlay "+" at 5731.54,2659.68 h39.37 r180
P1: Top Overlay "9" at 5302.24,2580.47 h59.06; Top Overlay "10" at 5302.24,2680.47 h59.06; Top Overlay "1" at 4788.08,2580.47 h59.06; Top Overlay "2" at 4768.4,2680.47 h59.06